# Altium PCB EMGfrontend.PcbDoc
Units mil, origin at the board's own origin, x right, y up, seen from the top; angles counter-clockwise.
Board outline 2050 x 1530 mil, 2 copper layers (Top Layer, Bottom Layer); 29 components, 22 nets, 82 pads, 20 vias.
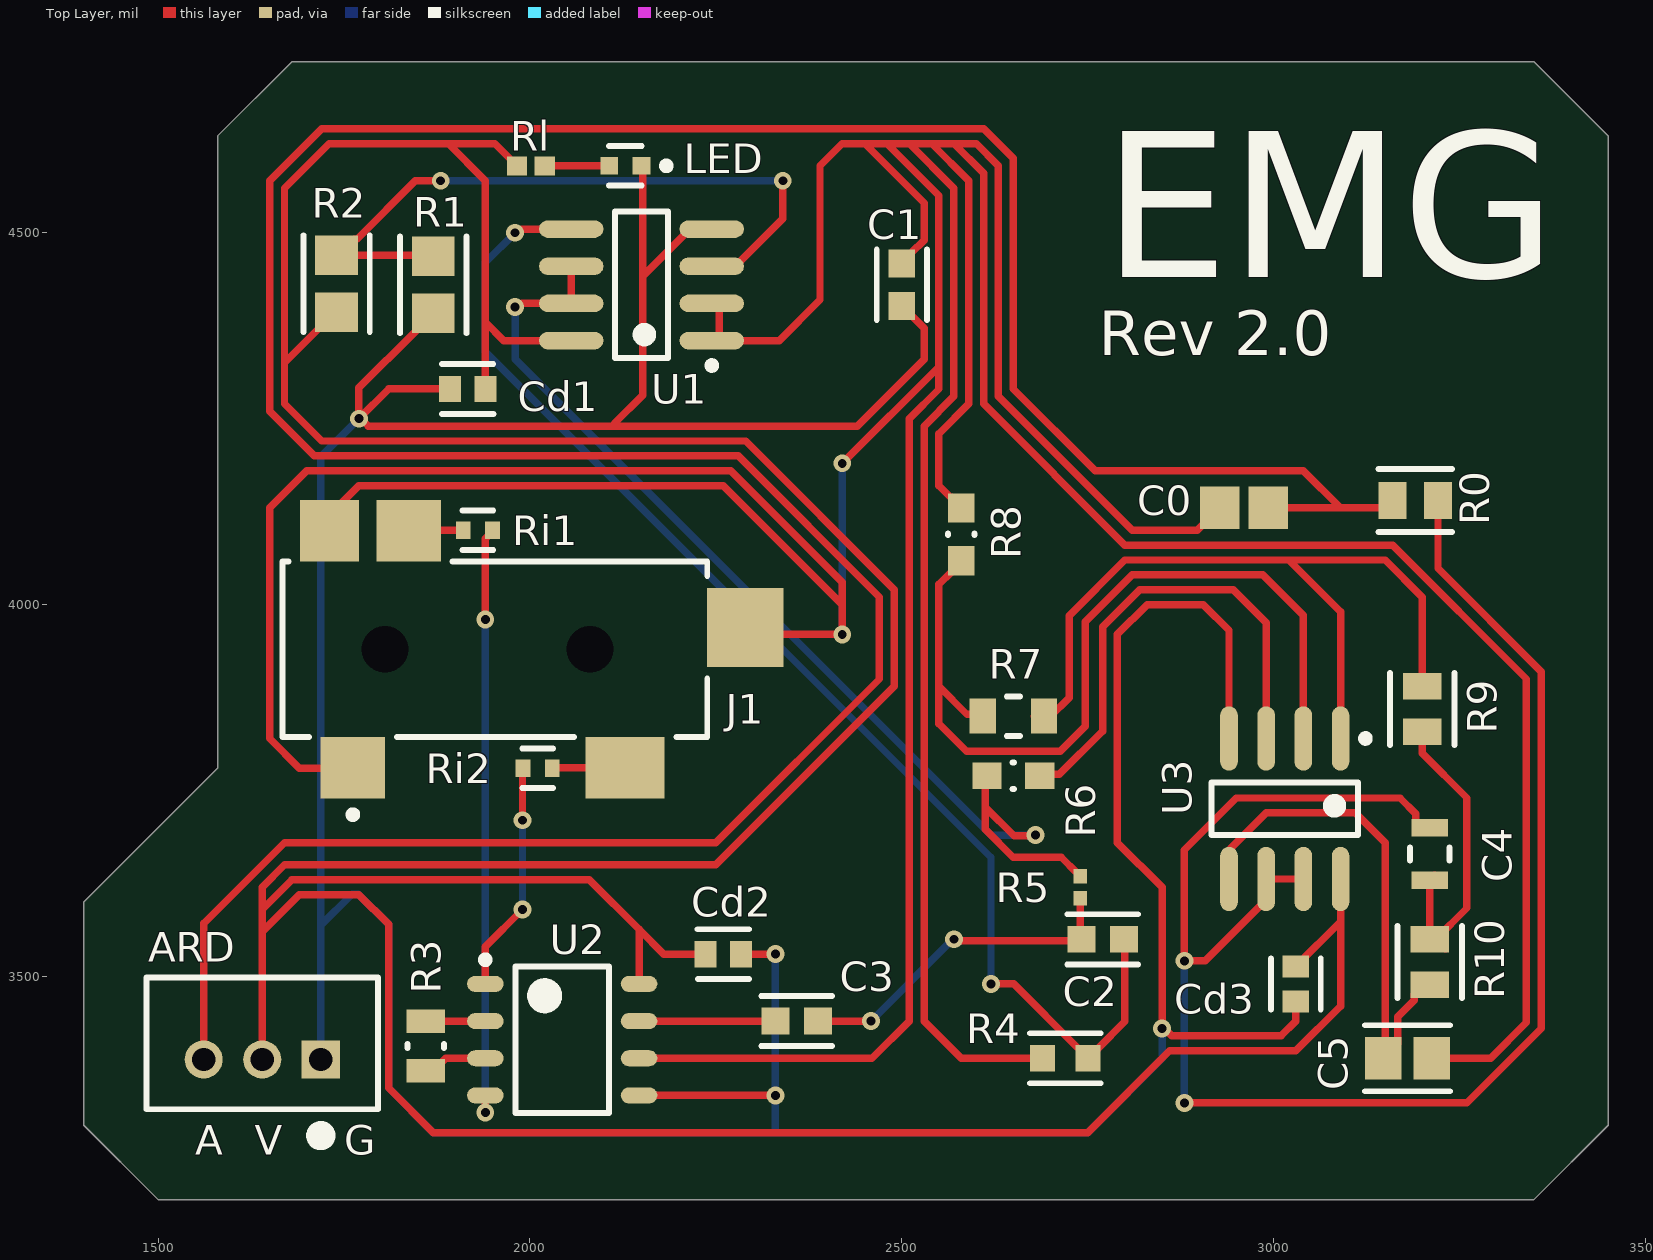
[diagram p0: Top Layer view]
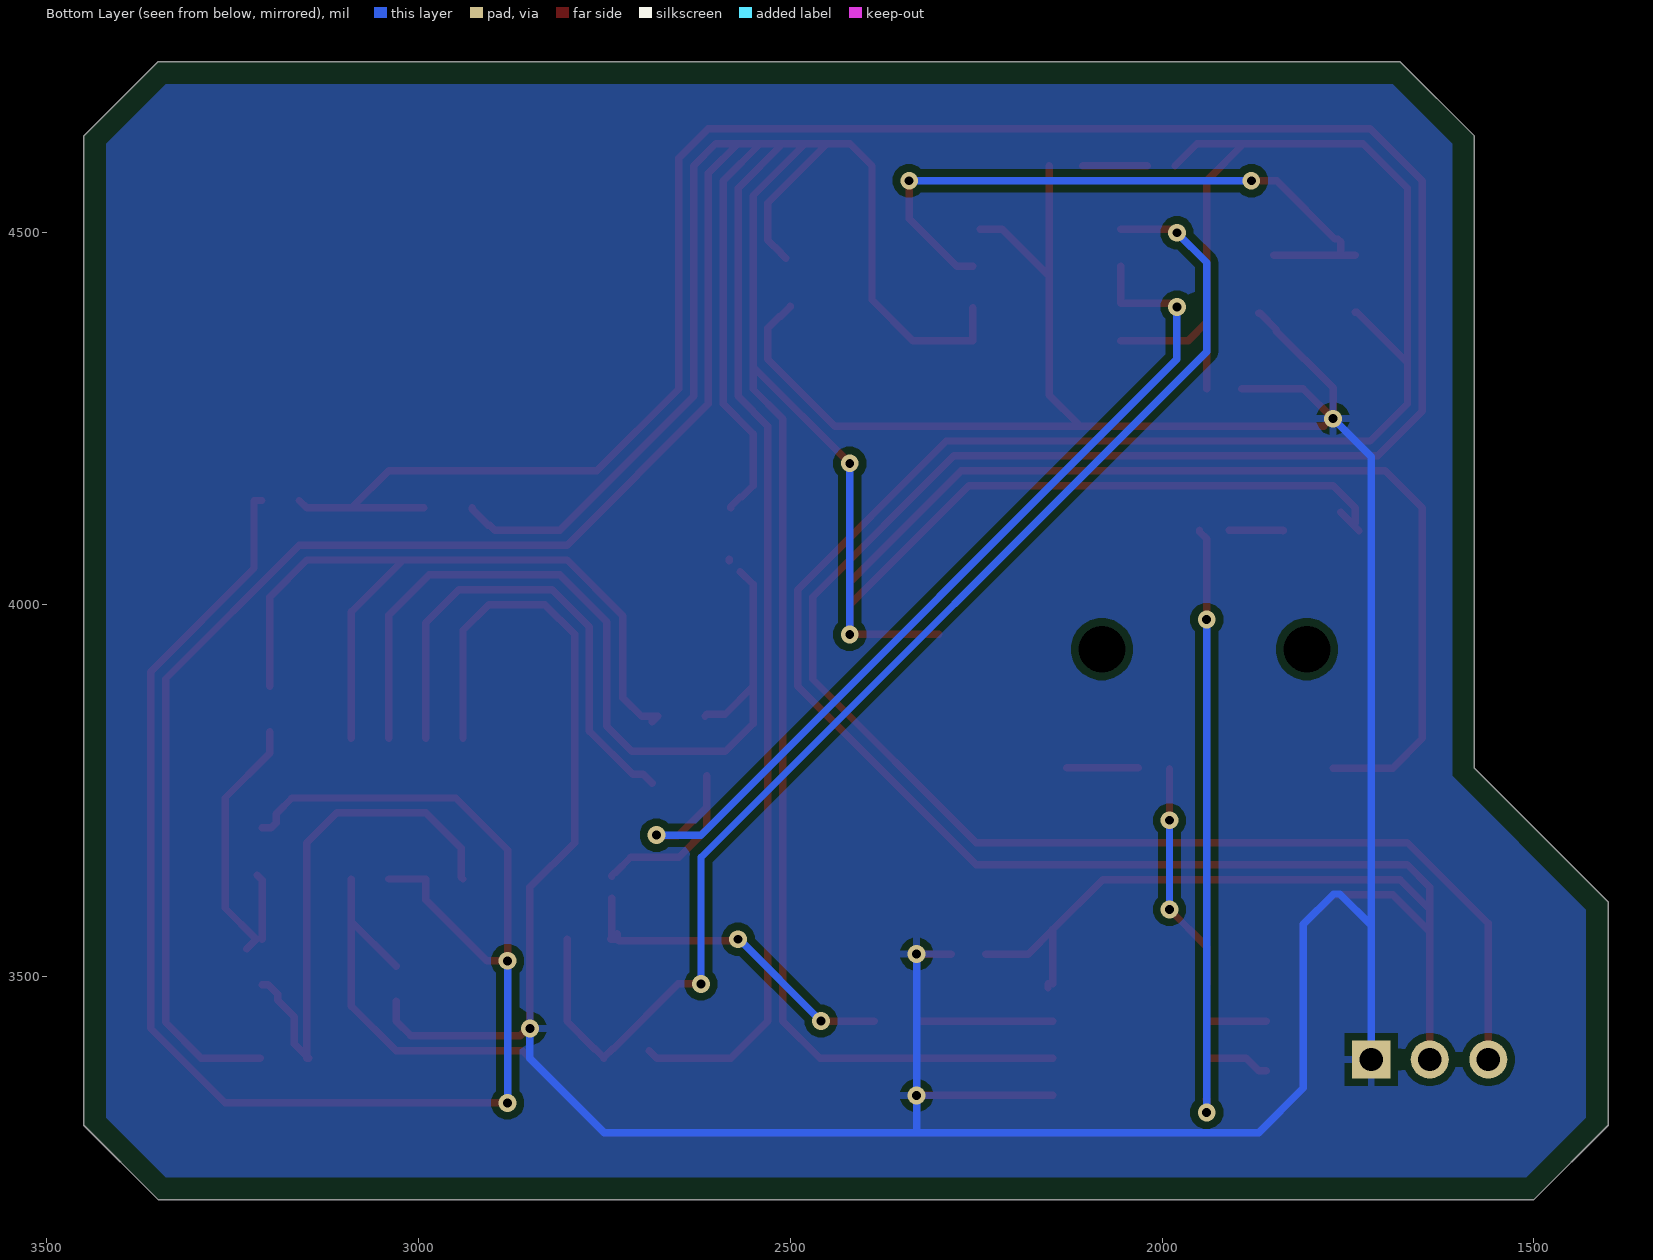
[diagram p1: Bottom Layer view, seen from below]
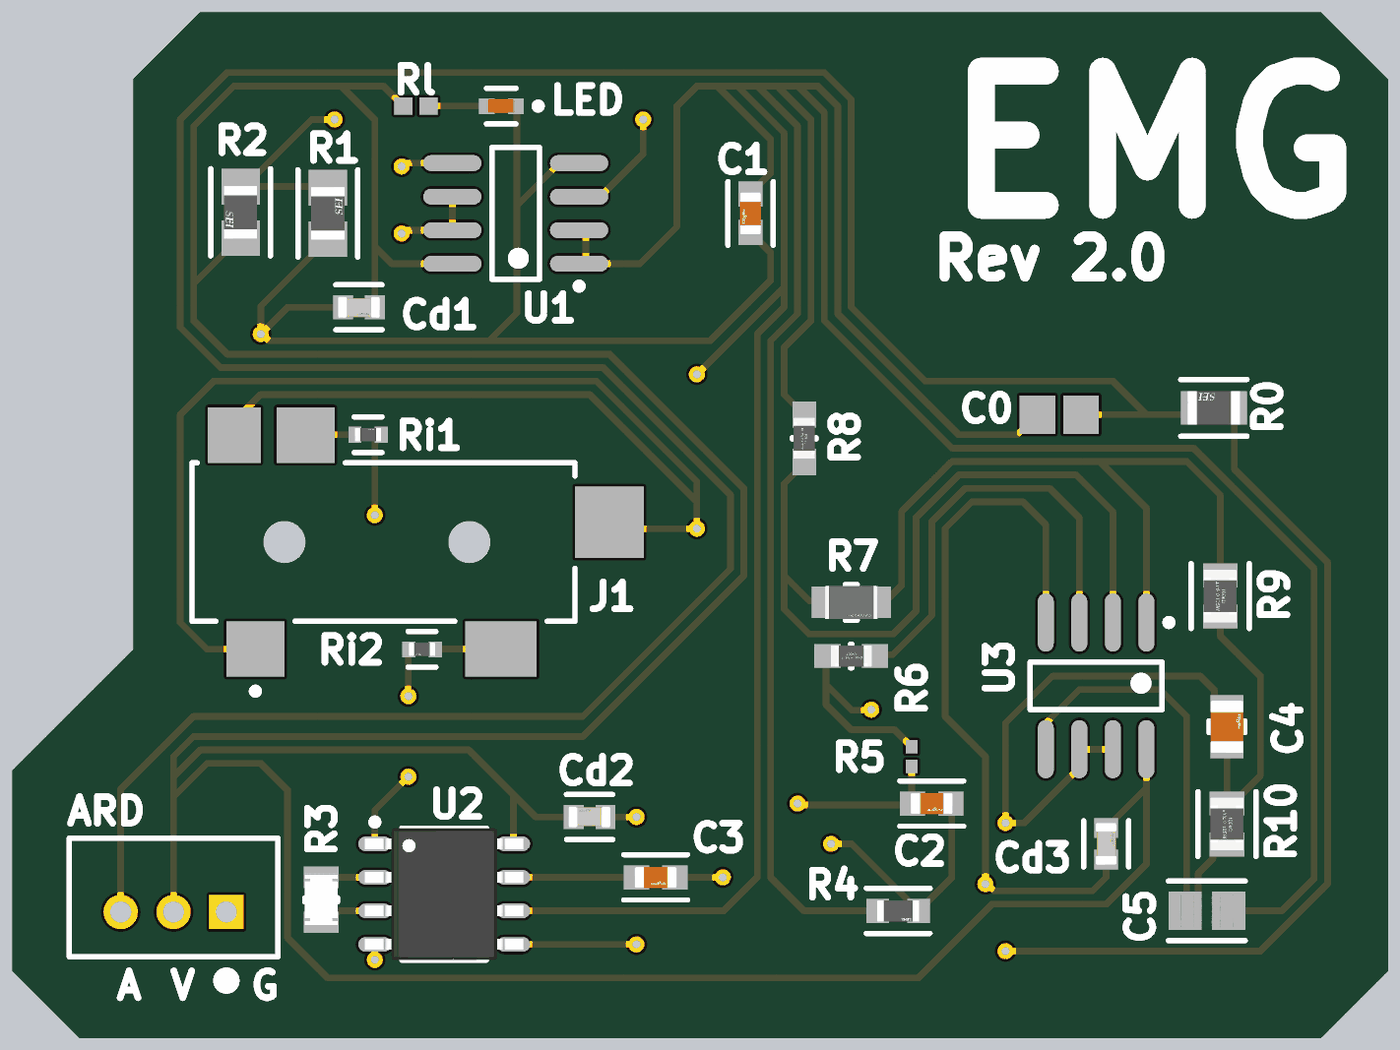
[diagram p2: 3D render of the assembled board from above, using the file's embedded part models]

## Layer stack, top to bottom
Top Solder: solder mask 0.4, Solder Resist, Dk 3.5
Top Layer: signal copper 1.4
Dielectric 1: dielectric 12.6, FR-4, Dk 4.8
Bottom Layer: signal copper 1.4
Bottom Solder: solder mask 0.4, Solder Resist, Dk 3.5

## Board outline
1500,3200 1400,3300 1400,3600 1580,3780 1580,4630 1680,4730 3350,4730 3450,4630 3450,3300 3350,3200

## Design rules (kind name [scope] priority, off if disabled: settings)
Clearance [All] p1: gap=10 ignorepadtopadclearanceinfootprint=FALSE
PolygonConnect [All] p1: connectstyle=Relief reliefconductorwidth=10 reliefentries=4 polygonreliefangle="90 Angle" airgapwidth=10
RoutingVias [All] p1: holewidth=12 width=24 viastyle="Through Hole" minholewidth=12 minwidth=24 maxholewidth=28 maxwidth=50
SolderMaskExpansion [All] p1: expansion=4 istentingtop=FALSE
Width [All] p1: maxlimit=10 minlimit=10 preferedwidth=10
30 further rules are at their usual default settings.

## Classes and differential pairs
component class VREF: C1 Cd1 R1 R2 U1
component class LPF(500Hz): C4 C5 Cd3 R9 R10
component class HPF(20Hz): C2 C3 R4 R5
component class EMGfrontend: ARD C0 J1 LED R0 Ri1 Ri2 Rl
component class AMP2: R6 R7 R8 U3
component class AMP1: Cd2 R3 U2

## Components (designator, comment, footprint, x,y, rotation, side; value= is the part's Value field where it differs from the comment)
ARD "PH2.0" JST-B3B-PH-K-S-3_V 1640,3410 r180 top
C0 "08055A102FAT2A" CAPC2013X94X50NL20T25 2960,4130 r180 top
C1 "GRT188R61H105KE13D" FP-GRT188-0_1-e0_2_0_5-IPC_B 2500,4430 r270 top
C2 "GRT188R61H105KE13D" FP-GRT188-0_1-e0_2_0_5-IPC_B 2770,3550 r0 top
C3 "GRT188R61H105KE13D" FP-GRT188-0_1-e0_2_0_5-IPC_B 2358.61,3440 r0 top
C4 "GRM2165C1H223JA01D" FP-GRM216-0_1-0_05-MFG 3210,3664.57 r90 top
C5 "CL21C103JBFNNNG" FP-CL21-IPC_B 3180,3390 r0 top
Cd1 "C0603C104J5RACTU" FP-C0603C-CF-MFG 1916.38,4290 r180 top value="0.10 μF"
Cd2 "C0603C104J5RACTU" FP-C0603C-CF-MFG 2260,3530 r0 top value="0.10 μF"
Cd3 "C0603C104J5RACTU" FP-C0603C-CF-MFG 3030,3490 r270 top value="0.10 μF"
J1 "" SWIT-35RASMT4BHNTRX_V 2010,3940 r0 top
LED "5988A10107F" FP-5988A10107F-MFG 2128.35,4590 r180 top
R0 "RMCF0805FG470R" FP-RMCF0805-IPC_C 3190.54,4140 r180 top
R1 "RMCF0805FG10K0" FP-RMCF0805-IPC_A 1870,4430 r90 top
R2 "RMCF0805FG10K0" FP-RMCF0805-IPC_A 1740,4431.58 r270 top
R3 "CRCW080515K0FKEA" FP-CRCW0805-e3-IPC_C 1860,3406.5 r90 top
R4 "AC0603FR-1311KL" FP-AC0603-IPC_B 2720,3390 r0 top
R5 "RC0402FR-075K6L" RESC1005X40X25LL05T10 2740,3620 r90 top
R6 "RP73PF1J1K0BTDF" FP-RP73P-1J-MFG 2650,3770 r0 top value=1KΩ
R7 "AC0805FR-0751KL" FP-AC0805-MFG 2650,3850 r0 top value=51KΩ
R8 "RP73PF1J1K0BTDF" FP-RP73P-1J-MFG 2580,4094.57 r270 top value=1KΩ
R9 "CRGCQ0805F22K" FP-CRGCQ0805-IPC_C 3200,3859.45 r270 top value=22KΩ
R10 "CRGCQ0805F22K" FP-CRGCQ0805-IPC_C 3210,3519.45 r270 top value=22KΩ
Ri1 "RC0402FR-075KL" FP-RC0402-MFG 1930,4100 r0 top value=5kΩ
Ri2 "RC0402FR-075KL" FP-RC0402-MFG 2010.32,3780 r180 top value=5kΩ
Rl "RC0402JR-07620RL" RESC1005X40X25ML05T10 2001.3,4590 r180 top
U1 "MCP6002T-E/SN" SOIC-SN8_N 2150,4430 r180 top
U2 "AD8226ARZ" ADI-R-8_L 2043.35,3415 r0 top
U3 "MCP6002T-E/SN" SOIC-SN8_N 3015,3725.51 r270 top

## Footprints (in the part's own frame and the unit in brackets; to place one, negate y for a bottom-side part, rotate by r counter-clockwise, add the part's x,y. Pads: shape width x height; smd on the part's side, far side on the other; paste and mask are expansions set on the pad)
ADI-R-8_L [mm] "SOIC, 8-Leads, Body 5x4mm, Pitch 1.27mm, IPC High Density"
  oval 1.25x0.55 smd: 1(-2.625,1.905) 2(-2.625,0.635) 3(-2.625,-0.635) 4(-2.625,-1.905) 5(2.625,-1.905) 6(2.625,-0.635) 7(2.625,0.635) 8(2.625,1.905)
  silkscreen extent -2.75,-2.5 1.6,2.85, body extent -3,-2.5 3,2.5, height 1.75
CAPC2013X94X50NL20T25 [mm] "Chip Capacitor, 2-Leads, Body 2.01x1.25mm, IPC Medium Density"
  rect 1.35x1.45 smd: 1(-0.825,0) 2(0.825,0)
  body extent -1.1,-0.72 1.11,0.72, height 0.94
FP-5988A10107F-MFG [mm]
  rect 0.6x0.6 smd paste+0 mask+0: 1(-0.55,0) 2(0.55,0)
  silkscreen extent -1.53,-0.67 0.56,0.67, body extent -0.95,-0.42 0.95,0.42, height 0.25
FP-AC0603-IPC_B [mil]
  rect 33.81x35.91 smd paste+0 mask+0: 1(-30.58,0) 2(30.58,0)
  silkscreen extent -47,-34 47,34, body extent -57,-28 57,28, height 10
FP-AC0805-MFG [mm]
  rect 0.9x1.2 smd paste+0 mask+0: 1(-1.05,0) 2(1.05,0)
  silkscreen extent -0.23,-0.67 0.23,0.67, body extent -1.6,-0.77 1.6,0.77, height 0.25
FP-C0603C-CF-MFG [mm]
  rect 0.75x0.9 smd paste+0 mask+0: 1(-0.6,0) 2(0.6,0)
  silkscreen extent -0.87,-0.85 0.88,0.85, body extent -1.2,-0.6 1.2,0.6, height 0.25
FP-CL21-IPC_B [mil]
  rect 49.4x57.33 smd paste+0 mask+0: 1(-32.51,0) 2(32.51,0)
  silkscreen extent -57,-44 57,44, body extent -67,-39 67,39, height 10
FP-CRCW0805-e3-IPC_C [mil]
  rect 31.75x51.5 smd paste+0 mask+0: 1(-33.5,0) 2(33.5,0)
  silkscreen extent -3,-25 3,25, body extent -53,-31 53,31, height 10
FP-CRGCQ0805-IPC_C [mil]
  rect 35.67x51.57 smd paste+0 mask+0: 1(-30.55,0) 2(30.55,0)
  silkscreen extent -48,-43 48,43, body extent -52,-31 52,31, height 10
FP-GRM216-0_1-0_05-MFG [mm]
  rect 0.6x1.25 smd paste+0 mask+0: 1(-0.9,0) 2(0.9,0)
  silkscreen extent -0.23,-0.67 0.23,0.67, body extent -1.3,-0.77 1.3,0.77, height 0.25
FP-GRT188-0_1-e0_2_0_5-IPC_B [mil]
  rect 37.74x35.91 smd paste+0 mask+0: 1(-28.61,0) 2(28.61,0)
  silkscreen extent -47,-34 47,34, body extent -57,-28 57,28, height 10
FP-RC0402-MFG [mm]
  rect 0.5x0.6 smd paste+0 mask+0: 1(-0.5,0) 2(0.5,0)
  silkscreen extent -0.53,-0.67 0.53,0.67, body extent -0.85,-0.4 0.85,0.4, height 0.25
FP-RMCF0805-IPC_A [mil]
  rect 53.33x57.56 smd paste+0 mask+0: 1(-38.42,0) 2(38.42,0)
  silkscreen extent -65,-45 65,45, body extent -85,-48 85,48, height 10
FP-RMCF0805-IPC_C [mil]
  rect 37.58x49.69 smd paste+0 mask+0: 1(-30.54,0) 2(30.54,0)
  silkscreen extent -49,-42 49,42, body extent -53,-31 53,31, height 10
FP-RP73P-1J-MFG [mm]
  rect 1x0.9 smd paste+0 mask+0: 1(-0.9,0) 2(0.9,0)
  silkscreen extent -0.03,-0.45 0.03,0.45, body extent -1.5,-0.55 1.5,0.55, height 0.25
JST-B3B-PH-K-S-3_V [mm] "Connector, 3-Leads, Body 7.9x4.5mm, Pitch 2mm"
  rect 1.3x1.3 hole 0.8: 1(-2,0.55)
  round 1.3 hole 0.8: 2(0,0.55) 3(2,0.55)
  silkscreen extent -3.95,-2.25 3.95,3.4, body extent -3.95,-2.25 3.95,2.25, height 6
RESC1005X40X25LL05T10 [mm] "Chip Resistor, 2-Leads, Body 1.00x0.50mm, IPC High Density"
  rect 0.5x0.45 smd: 1(-0.375,0) 2(0.375,0)
  body extent -0.53,-0.27 0.53,0.28, height 0.4
RESC1005X40X25ML05T10 [mm] "Chip Resistor, 2-Leads, Body 1.00x0.50mm, IPC Low Density"
  rect 0.7x0.65 smd: 1(-0.475,0) 2(0.475,0)
  body extent -0.53,-0.27 0.53,0.28, height 0.4
SOIC-SN8_N [mm] "SOIC, 8-Leads, Body 4.9x3.9mm, Pitch 1.27mm, IPC Medium Density"
  oval 2.2x0.6 smd: 1(-2.4,1.905) 2(-2.4,0.635) 3(-2.4,-0.635) 4(-2.4,-1.905) 5(2.4,-1.905) 6(2.4,-0.635) 7(2.4,0.635) 8(2.4,1.905)
  silkscreen extent -2.53,-2.5 0.9,2.88, body extent -2,-2.5 2,2.5, height 1.75
SWIT-35RASMT4BHNTRX_V [mm] "Jack, 5-Leads, Body 17x6mm"
  rect 2.2x2.1 smd: 1(-6.3,-4.05) 2(-4.4,4.05)
  rect 2.7x2.1 smd: 3(3,-4.05)
  rect 2x2.1 smd: 4(-7.1,4.05)
  rect 2.6x2.7 smd: 5(7.1,0.75)
  rect 0x0 hole 1.6 unplated: MH(-5.2,0) MH(1.8,0)
  silkscreen extent -8.7,-5.77 5.8,3, body extent -11.2,-3 5.8,3, height 5

## Part data
ARD: library part CMP-2000-05164-1, "Male Header, Pitch 2 mm, 1 x 3 Position, Height 6 mm, Tail Length 3.4 mm, -25 to 85 degC, RoHS, Bulk", Manufacturer=JST, Datasheet URL=https://datasheet.ciiva.com/11746/0900766b80826550-11746939.pdf, Datasheet Version=Oct-06, Manufacturer URL=http://www.jst.com/home2.html, No of Positions=3, Pitch=2mm, Style/Orientation=StraightHeader/Plug, Termination=Crimp, Type=ShroudedHeader
C0: library part CMP-2007-04267-1, Manufacturer="AVX Interconnect / Elco", Part Number=08055A102FAT2A
C1 C2 C3: library part CMP-06035-031856-1, "Multi-Layer Ceramic Capacitor 1uF 50V X5R ±10% 0603 Paper T/R", Capacitance=1uF, Case Code (Imperial)=0603, Case Code (Metric)=1608, Dielectric=X5R, Max Operating Temperature=85°C, Min Operating Temperature=-55°C, Ratings=AEC-Q200, Tolerance=10%, Voltage Rating=50V, Case/Package=0603, Length=0.063inch, Mount="Surface Mount", Packaging="Tape and Reel", Thickness=0.035inch, Voltage Rating (DC)=50V, Width=0.031inch
C4: library part CMP-06035-050815-1, "22000pF"
C5: library part CMP-13271-003702-1, "10nF", Case Code (Imperial)=0805, Case Code (Metric)=2012, Dielectric=C0G, Max Operating Temperature=125°C, Min Operating Temperature=-55°C, Package Quantity=3000, Temperature Coefficient=300ppm/°C, Tolerance=5%, Voltage=50V, Capacitance=10nF, Case/Package=0805, Depth=1.25mm, Height=1.25mm, Length=2mm, Mount="Surface Mount", Packaging="Tape and Reel", Radiation Hardening=No, Thickness=0.053inch, Voltage Rating=50V, Width=0.049inch
Cd1 Cd2 Cd3: library part CMP-2006-03056-2, "CAP CER 0.1UF 50V 5% X7R 0603", Capacitance="0.10 μF", Manufacturer=KEMET, Package=C0603C-CF, Temperature="-55°C to +125°C", Temperature Characteristic=X7R, Temperature Coefficient=30ppm/°C, Temperature Range High=+125°C, Temperature Range Low=-55°C, Tolerance=0.05, Voltage Rating="50 V", Automotive=Yes, Automotive Grade="Grade 1", Category=Cap, ComponentLink2Description=Datasheet, ComponentLink2URL=https://api.kemet.com/component-edge/download/datasheet/C0603C100J5GACAUTO.pdf, Device Class L1="Passive Components", Device Class L2=Capacitors, Device Class L3="Ceramic Capacitors", Digikey Description="CAP CER 0.1UF 50V 5% X7R 0603", Height=0.87mm, Lead Free=Yes, Manufacturer Part Number=C0603C104J5RACTU, Material=Ceramic, Mouser Description="Multilayer Ceramic Capacitors MLCC - SMD/SMT 50volts 0.1uF X7R 5%", Octopart=https://octopart.com/c0603c104j5ractu-kemet-10440638, RoHS=TRUE
J1: library part CMP-1772-00001-1, "Female 3.5 mm Phone Jack, 5 Position, Height 5 mm, RoHS, Tape and Reel", Current Rating="50 mA", Package Quantity=3000, Voltage Rating (DC)="12 V", ComponentLink1Description="Manufacturer URL", ComponentLink1URL=http://www.switchcraft.com/, ComponentLink2Description=Datasheet, ComponentLink2URL=http://www.switchcraft.com/Drawings/35rasmt4bhntrx_cd.pdf, Contact Material=Silver, Contact Plating=Silver, DatasheetVersion="Rev. C, 07/2014", Mount="Through Hole", PackageDescription="Female 3.5 mm Phone Jack, 5 Position, Height 5 mm", PackageReference=35RASMT4BHNTRX, Packaging="Tape and Reel", RoHSCompliant=true
LED: library part CMP-00106-100993512-1, "5988A10107F LED Uni-Color Red 2-Pin Chip 0402(1006Metric) T/R", Case/Package=0402, Color=Red, Forward Current=5mA, Forward Voltage=1.6V, Max Operating Temperature=85°C, Min Operating Temperature=-40°C, Power Dissipation=46mW, Reverse Voltage=5V, Height=533.4µm, Luminous Intensity=65mcd, NexarPartId=100993512, RoHS=Compliant, Schedule B="8541402000, 8541402000", Viewing Angle=140°, Wavelength=635nm
R0: library part CMP-26527-003746-1, "470Ω ±1% 0.125W 0805 Thick Film Chip Resistor AEC-Q200 compliant", Case/Package=0805, Max Operating Temperature=155°C, Max Power Dissipation=125mW, Min Operating Temperature=-55°C, Resistance=470R, Resistor Type="Thick Film", Temperature Coefficient=100ppm/°C, Tolerance=1%, Contact Plating=Tin, Features="Automotive AEC-Q200", Mount="Surface Mount", Number of Terminations=2, Packaging="Tape and Reel", Radiation Hardening=No, RoHS Compliant=Yes, Series=RMCF
R1 R2: library part CMP-26527-002739-1, "10kΩ ±1% 0.125W 0805 Thick Film Chip Resistor AEC-Q200 compliant", Case Code (Imperial)=0805, Case Code (Metric)=2012, Max Operating Temperature=155°C, Max Power Dissipation=125mW, Min Operating Temperature=-55°C, Resistance=10kR, Resistor Type="Thick Film", Temperature Coefficient=100ppm/°C, Tolerance=1%, Case/Package=0805, Construction=Rectangular, Contact Plating=Tin, Depth=1.25mm, Features="Automotive AEC-Q200", Height=0.026inch, Length=0.079inch, Military Standard=Not, Mount="Surface Mount", Number of Terminations=2, Packaging="Tape and Reel", Radiation Hardening=No, RoHS Compliant=Yes, Series=RMCF, Width=0.049inch
R3: library part CMP-2001-04967-2, "RES Thick Film, 15kΩ, 1%, 0.125W, 100ppm/°C, 0805", Case Code (Imperial)=0805, Case Code (Metric)=2012, Max Operating Temperature=155°C, Max Power Dissipation=125mW, Min Operating Temperature=-55°C, Package Quantity=10, Resistance=15kR, Temperature Coefficient=100ppm/°C, Tolerance=1%, Voltage Rating=150V, Case/Package=0805, Composition="Thick Film", Contact Plating=Tin, Depth=1.25mm, Features="Automotive AEC-Q200", Height=0.45mm, Lead Free="Lead Free", Length=2mm, Military Standard=Not, Mount="Surface Mount", Number of Terminations=2, Packaging="Tape and Reel", Power Rating=125mW, Radiation Hardening=No, Termination=SMD/SMT, Voltage Rating (DC)=150V, Weight=0.000194oz, Width=0.049inch
R4: library part CMP-03412-047641-1, "RES 11KΩ 1.00% 0.1W 0603", RoHS Compliant=Yes
R5: library part CMP-2002-07756-1, Manufacturer="Yageo / Phycomp", Part Number=RC0402FR-075K6L
R6 R8: library part CMP-03211-004517-1, "RES SMD 1K OHM 0.1% 1/6W 0603", Manufacturer="TE Connectivity", Package=RP73P-1J, Power Rating=0.166W, Resistance=1KΩ, Temperature="-55°C to +155°C", Temperature Coefficient=25ppm/°C, Temperature Range High=+155°C, Temperature Range Low=-55°C, Tolerance=0.001, Voltage Rating=100V, Automotive=No, Category=Res, ComponentLink2Description=Datasheet, ComponentLink2URL=https://www.te.com/commerce/DocumentDelivery/DDEController?Action=srchrtrv&DocNm=1773272&DocType=DS&DocLang=English, Composition="Thin Film", Device Class L1="Passive Components", Device Class L2=Resistors, Device Class L3="Chip SMD Resistors", Digikey Description="RES SMD 1K OHM 0.1% 1/6W 0603", Height=0.55mm, Ipc Land Pattern Name=RESC15580X45, Lead Free=Yes, Manufacturer Part Number=RP73PF1J1K0BTDF, Octopart=https://octopart.com/rp73pf1j1k0btdf-te+connectivity-45465729, RoHS=TRUE, Series=RP73P
R7: library part CMP-03412-037324-1, "RES SMD 51K OHM 1% 1/8W 0805", Manufacturer=Yageo, Package=AC0805, Power Rating=1/8W, Resistance=51KΩ, Temperature="-55°C to +155°C", Temperature Range High=+155°C, Temperature Range Low=-55°C, Tolerance=0.01, Voltage Rating=150V, Automotive=Yes, Automotive Grade="Grade 0", Category=Res, ComponentLink2Description=Datasheet, ComponentLink2URL=http://www.yageo.com/documents/recent/PYu-AC_51_RoHS_L_6.pdf, Composition="Thick Film", Device Class L1="Passive Components", Device Class L2=Resistors, Device Class L3="Chip SMD Resistors", Digikey Description="RES SMD 51K OHM 1% 1/8W 0805", Footprint Url=http://www.yageo.com/exep/pages/download/literatures/PYu-R_Mount_10.pdf, Height=0.6mm, Ipc Land Pattern Name=RESC200125X50, Lead Free=Yes, Manufacturer Part Number=AC0805FR-0751KL, Mouser Description="Thick Film Resistors - SMD 1/8W 51K ohm 1%", Octopart=https://octopart.com/ac0805fr-0751kl-yageo-24874955, RoHS=TRUE, Series=AC
R9 R10: library part CMP-03211-003824-1, "CRGCQ0805 22KΩ 0.125W ±100ppm/°C 1% 150V", Ambient Temperature Range High=+70°C, Manufacturer="TE Connectivity", Package=CRGCQ0805, Power Rating=0.125W, Resistance=22KΩ, Temperature="-55°C to +155°C", Temperature Coefficient=±100ppm/°C, Temperature Range High=+155°C, Temperature Range Low=-55°C, Tolerance=0.01, Voltage Rating=150V, Automotive=Yes, Automotive Grade="Grade 985", Category=Res, ComponentLink2Description=Datasheet, ComponentLink2URL=https://www.te.com/commerce/DocumentDelivery/DDEController?Action=showdoc&DocId=Data+Sheet%7F1773204-3%7F1%7Fpdf%7FEnglish%7FENG_DS_1773204-3_1.pdf%7F4-2176341-994, Composition="Thick Film", Device Class L1="Passive Components", Device Class L2=Resistors, Device Class L3="Chip SMD Resistors", Height=0.65mm, Ipc Land Pattern Name=RESC200125X55, Lead Free=Yes, Manufacturer Part Number=CRGCQ0805F22K, Octopart=https://octopart.com/crgcq0805f22k-te+connectivity-91018161, RoHS=TRUE, Series=CRGCQ
Ri1 Ri2: library part CMP-03412-013078-1, "RES SMD 5K OHM 1% 1/16W 0402", Manufacturer=Yageo, Package=RC0402, Power Rating=0.0625W, Resistance=5kΩ, Temperature="-55°C to +155°C", Temperature Coefficient=100ppm/°C, Temperature Range High=+155°C, Temperature Range Low=-55°C, Tolerance=1%, Voltage Rating=50V, Automotive=No, Category=Res, ComponentLink2Description=Datasheet, ComponentLink2URL=http://www.yageo.com/documents/recent/PYu-RC_Group_51_RoHS_L_10.pdf, Composition="Thick Film", Device Class L1="Passive Components", Device Class L2=Resistors, Device Class L3="Chip SMD Resistors", Digikey Description="RES SMD 5K OHM 1% 1/16W 0402", Footprint Url=https://pccomponents.com/datasheets/YAGEO-20RESISTORS.PDF, Height=0.4mm, Ipc Land Pattern Name=RESC10050X35, Lead Free=Yes, Manufacturer Part Number=RC0402FR-075KL, Octopart=https://octopart.com/rc0402fr-075kl-yageo-25450038, RoHS=TRUE, Series=RC_L
Rl: library part CMP-2002-07079-1, Manufacturer="Yageo / Phycomp", Part Number=RC0402JR-07620RL
U1 U3: library part CMP-0187-00363-3, "None", Case/Package=SOIC, Input Bias Current=1pA, Input Offset Voltage (Vos)=4.5mV, Max Operating Temperature=125°C, Max Supply Voltage=6V, Min Operating Temperature=-40°C, Min Supply Voltage=1.8V, Nominal Supply Current=100uA, Operating Supply Voltage=5.5V, Output Current=23mA, Package Quantity=3300, Power Supply Rejection Ratio (PSRR)=86dB, Voltage Gain=112dB, Amplifier Type="GENERAL PURPOSE", Common Mode Rejection Ratio=60dB, Gain Bandwidth Product=1MHz, Lead Free="Lead Free", Mount="Surface Mount", Number of Channels=2, Number of Circuits=2, Number of Elements=2, Number of Pins=8, Operating Supply Current=100uA, Output Current per Channel=23mA, Packaging="Tape and Reel", Radiation Hardening=No, RoHS Compliant=Yes, Series=-, Slew Rate=0.6V/µs, Supply Current=100uA, Technology=CMOS, Unity Gain Bandwidth Product=1MHz
U2: library part CMP-2000-05749-1, "Wide Supply Range, Rail-to-Rail Output Instrumentation Amplifier, 2.2 to 36 V, -40 to 125 degC, 8-Pin SOIC (R-8), RoHS, Tube", Current - Input Bias=20nA, Current - Output / Channel=13mA, Current - Supply=350µA, Manufacturer="Analog Devices", Operating Temperature=-40°C~125°C, Package / Case="8-SOIC(0.154\",3.90mmWidth)", Package Description="8-Pin Small Outline Package, Body 4.9 x 3.9 mm, Pitch 1.27 mm", Package Reference=R-8, Standard Package=98, Supplier Device Package=8-SOIC, Voltage - Input Offset=100µV, Voltage - Supply, Single/Dual (±)=2.2V~36V,±1.35V~18V, -3db Bandwidth=1.5MHz, Amplifier Type=Instrumentation, Category=IntegratedCircuits(ICs), Datasheet URL=http://www.analog.com/media/en/technical-documentation/data-sheets/AD8226.pdf, Datasheet Version="Rev. C, 09/2012", Design Resources=PLCandDCSUniversalAnalogInputUsingEither4or6-PinTerminalBlock, EDA / CAD Models=DownloadfromAcceleratedDesigns, Family=Linear-Amplifiers-Instrumentation,OPAmps,BufferAmps, Gain Bandwidth Product=-, Manufacturer URL=http://www.analog.com/, Mfg Application Notes=AutomaticExternalDefibrillator(AED)SolutionsElectromagneticFlowMeterSolutionsMotorControlSolution—ServoControlProgrammableLogicControllers(PLCs)SolutionsElectrocardiogram(ECG)Solutions, Mounting Technology=SurfaceMount, Mounting Type=SurfaceMount, Number of Circuits=1, Online Catalog=Instrumentation, Output Type=Rail-to-Rail, Packaging=Tube, PCN Design/Specification=PolyimideAlignmentTarget11/Aug/2015, Product Training Modules=CommonPhotodiodeOp-AmpCircuitProblemsandSolutionsIndirectCurrentFeedbackInstrumentationAmplifierApplicationsGuide, Series=-, Slew Rate=0.6V/µs

## Via types
v1: diameter 24, hole 12, Top Layer to Bottom Layer, 20 vias

## Nets (pads, with @x,y where several pads share a name; then routed paths per layer and width w, separated by ;. In a path a pad name is that pad's centre, name@x,y a point inside that pad or via, vN(x,y) a via of type N, cw(c..) or ccw(c..) an arc to the next point about the centre after c; other vN are vias at no path point)
NetARD_1: ARD.1 C1.2 Cd1.2 Cd2.2 Cd3.2 LED.1 R1.1 U1.4 U2.5 U3.4 | length 5634.2
  Top Layer w10: R1.1 1867.88,4391.58 1846.22,4369.92 1846.22,4367.8 1770,4291.58 v1(1770,4250) ; Cd1.2 1810,4290 v1(1770,4250) ; 2114.23,4244.23 2151.65,4281.65 2151.65,4441.65 ; U2.5 v1(2330,3340) ; LED.1@2151.65,4590 2151.65,4441.65 ; U1.4 2215,4505 2151.65,4441.65 ; Cd2.2 v1(2330,3530) ; C1.2 2500,4400.47 2512.96,4387.52 2513.87,4387.52 2530,4371.39 2530,4330 2440,4240 2114.23,4240 1782.86,4240 1772.86,4250 v1(1770,4250) ; U3.4 2940,3965.54 2905.54,4000 2830,4000 2790,3960 2790,3680 2850,3620 v1(2850,3430) 2852.86,3430 2862.86,3420 3010,3420 3030,3440 Cd3.2
  Bottom Layer w10: ARD.1 1718.74,3568.74 ; v1(1770,4250) 1718.74,4198.74 1718.74,3568.74 ; v1(2330,3530) v1(2330,3340) 2330,3290 ; v1(2850,3430) 2850,3390 2750,3290 2330,3290 ; 1718.74,3568.74 1760.86,3610.86 1769.14,3610.86 1810,3570 1810,3350 1870,3290 2330,3290
NetARD_2: ARD.2 Cd1.1 Cd2.1 Cd3.1 R2.2 Rl.2 U1.8 U2.8 U3.8 | length 6253.2
  Top Layer w10: ARD.2 1640,3560 ; R2.2 1737.88,4393.17 1670,4325.28 ; Cd1.1 1940,4380 ; Rl.2 1952.6,4620 1890,4620 ; U1.8 1965,4355 1940,4380 ; U2.8 2146.69,3563.31 ; U2.8@2153.35,3485 U2.8@2153.35,3490 ; Cd2.1@2236.9,3530 Cd2.1 2180,3530 2146.69,3563.31 ; Cd3.1 3090,3573.62 ; U3.8 3090,3573.62 ; 1640,3560 1690,3610 1770,3610 1810,3570 1810,3350 1870,3290 2750,3290 2860,3400 3030,3400 3090,3460 3090,3573.62 ; 1640,3560 1640,3590 ; 1640,3590 1640,3620 1670,3650 2250,3650 2490,3890 2490,4020 2290,4220 1720,4220 1670,4270 1670,4325.28 ; 1640,3590 1680,3630 2080,3630 2146.69,3563.31 ; 1670,4325.28 1670,4560 1730,4620 1890,4620 ; 1890,4620 1940,4570 1940,4380
NetARD_3: ARD.3 C0.1 R0.2 | length 4604.9
  Top Layer w10: ARD.3 1561.26,3571.26 1670,3680 2250,3680 2470,3900 2470,4010 2280,4200 1710,4200 1650,4260 1650,4570 1720,4640 2610,4640 2650,4600 2650,4290 2760,4180 3040,4180 3090,4130 ; C0.1 3090,4130 ; R0.2 3150,4130 3090,4130
NetC0_2: C0.2 C1.1 C5.2 J1.1 J1.4 J1.5 R4.1 R8.1 U1.1 U1.2 U2.6 | length 9672.5
  Top Layer w10: J1.4@1735.2,4099.45 J1.4@1759.93,4124.18 ; J1.4@1740,4110 1740,4130 1770,4160 2260,4160 2420,4000 ; J1.1@1770,3780 1690,3780 1650,3820 1650,4130 1700,4180 2270,4180 2420,4030 2420,4000 ; U2.6 2460,3390 2510,3440 2510,4250 2550,4290 2550,4320 ; U1.2@2254.49,4399.32 2254.49,4355 2335,4355 2390,4410 2390,4590 2420,4620 2450,4620 ; J1.5@2300.47,3960 v1(2420,3960) 2420,4000 ; v1(2420,4190) 2550,4320 ; C1.1@2505.69,4465.69 2506.16,4465.69 2512.96,4472.48 2512.96,4472.96 2530,4490 2530,4540 2450,4620 ; R8.1 2580,4131.97 2567.28,4144.69 2565.31,4144.69 2550,4160 2550,4230 2590,4270 2590,4570 2540,4620 ; R4.1@2689.42,3400 2679.42,3390 2580,3390 2530,3440 2530,4240 2570,4280 2570,4560 2510,4620 ; C0.2 2927.52,4128.03 2905.94,4106.46 2903.98,4106.46 2897.52,4100 2810,4100 2630,4280 2630,4590 2600,4620 2570,4620 ; C5.2 3291.72,3390 3340,3438.28 3340,3900 3160,4080 2800,4080 2610,4270 2610,4580 2570,4620 ; 2450,4620 2480,4620 ; 2480,4620 2510,4620 ; 2480,4620 2550,4550 2550,4320 ; 2510,4620 2540,4620 ; 2540,4620 2570,4620
  Bottom Layer w10: v1(2420,3960) v1(2420,4190)
NetC2_1: C2.1 C3.2 R5.1 | length 464.9
  Top Layer w10: C3.2 v1(2458.61,3440) ; v1(2570,3550) 2572.01,3547.99 2730.8,3547.99 C2.1@2732.81,3550 ; C2.1@2732.81,3557.66 C2.1@2732.81,3550 ; R5.1 2740,3551.39 C2.1 C2.1@2732.81,3550
  Bottom Layer w10: v1(2458.61,3440) 2568.61,3550 v1(2570,3550)
NetC2_2: C2.2 R4.2 U1.5 | length 1728.5
  Top Layer w10: v1(1980,4500) 1983.79,4500 1988.79,4505 U1.5 ; v1(2620,3490) 2650.58,3490 2737.62,3402.96 2738.68,3402.96 R4.2@2750.58,3391.05 ; R4.2 R4.2@2750.58,3391.05 ; C2.2@2800,3550 2800,3439.42 2763.53,3402.96 2762.48,3402.96 R4.2@2750.58,3391.05
  Bottom Layer w10: v1(1980,4500) 1940,4460 1940,4340 2620,3660 v1@2620,3500
NetC3_1: C3.1 U2.7 | length 183.3
  Top Layer w10: U2.7 C3.1
NetC4_1: C4.1 R9.2 R10.1 | length 428.1
  Top Layer w10: R9.2 3200,3800 3260,3740 3260,3592.05 3217.95,3550 R10.1@3230.78,3537.16 ; R10.1 C4.1 C4.1@3216.81,3635.94
NetC4_2: C4.2 R0.1 U3.6 U3.7 | length 2244
  Top Layer w10: v1(2880,3330) 3260,3330 3360,3430 3360,3910 3221.09,4048.91 R0.1 R0.1@3210.54,4140 ; U3.7 U3.6 2990,3603.21 2907.81,3521.02 v1(2880,3521.02) 2880,3670 2950,3740 3170,3740 3191.18,3718.82 3191.18,3706.81 3198,3700 C4.2
  Bottom Layer w10: v1(2880,3330) v1(2880,3521.02)
NetC5_1: C5.1 R10.2 U3.5 | length 705.7
  Top Layer w10: U3.5 2942.61,3633.63 2942.61,3672.61 2990,3720 3110,3720 3150,3680 C5.1@3150,3390 ; C5.1 3167.19,3409.7 3167.19,3446.08 3189.22,3468.11 3189.22,3476.06 3202.05,3488.89 R10.2
NetJ1_2: J1.2 Ri1.1 | length 73.5
  Top Layer w10: J1.2 1837.32,4100 Ri1.1@1910,4100
NetJ1_3: J1.3 Ri2.1 | length 96.4
  Top Layer w10: Ri2.1@2031.68,3780.55 J1.3
NetLED_2: LED.2 Rl.1 | length 86.7
  Top Layer w10: Rl.1 LED.2
NetR1_2: R1.2 R2.1 U1.3 | length 904.9
  Top Layer w10: R2.1 R2.1@1760,4470 ; R1.2@1850,4470 R2.1@1760,4470 ; v1(1880,4570) 1845.86,4570 1767.52,4491.67 1763.78,4491.67 1760,4487.88 R2.1@1760,4470 ; U1.3@2254.49,4455 2275.98,4455 2340,4519.02 v1(2340,4570)
  Bottom Layer w10: v1(1880,4570) v1(2340,4570)
NetR3_1: R3.1 U2.3 | length 87
  Top Layer w10: R3.1 1869.88,3373 1886.87,3390 U2.3
NetR3_2: R3.2 U2.2 | length 80
  Top Layer w10: R3.2 U2.2
NetR5_2: R5.2 R6.1 U1.6 U1.7 | length 1473.4
  Top Layer w10: v1(1980,4400) 1983.79,4400 1988.79,4405 U1.7 U1.6 ; R6.1@2612.28,3770 2612.28,3727.72 ; v1(2680,3690) 2679.09,3689.09 2650.91,3689.09 2612.28,3727.72 ; R5.2 2740,3635.75 2736.14,3639.61 2735.16,3639.61 2714.76,3660 2650,3660 2612.28,3697.72 2612.28,3727.72
  Bottom Layer w10: v1(1980,4400) 1980,4330 2620,3690 v1(2680,3690)
NetR6_2: R6.2 U3.3 | length 668.2
  Top Layer w10: R6.2@2685.43,3760 2697.46,3772.02 2712.02,3772.02 2770,3830 2770,3970 2820,4020 2945.54,4020 2990,3975.54 U3.3
NetR7_1: R7.1 R8.2 U3.2 | length 1168.3
  Top Layer w10: R8.2@2567.28,4044.45 2550,4027.17 2550,3890 ; R8.2@2582.01,4059.18 R8.2@2582.01,4061.14 ; R7.1@2614.57,3850 2612.28,3852.29 2587.71,3852.29 2550,3890 ; U3.2 3040,3985.54 2985.54,4040 2810,4040 2746.71,3976.71 2746.71,3836.71 2712.99,3802.99 2587.01,3802.99 2550,3840 2550,3890
NetR7_2: R7.2 R9.1 U3.1 | length 1100.3
  Top Layer w10: U3.1 3090,3990.54 3020.54,4060 ; R9.1 3200,4010 3150,4060 3020.54,4060 ; R7.2@2685.43,3850 2678.15,3850 2685.43,3842.72 R7.2@2685.43,3850 ; R7.2@2685.43,3850 R7.2 2700,3850 2725,3875 2725,3985 2800,4060 3020.54,4060
NetRi1_2: Ri1.2 U2.4 | length 805.2
  Top Layer w10: v1(1940,3317) 1940,3334.62 U2.4@1940.38,3335 ; v1(1940,3980) 1940,4088.35 1949.68,4098.03 Ri1.2
  Bottom Layer w10: v1(1940,3317) v1(1940,3980)
NetRi2_2: Ri2.2 U2.1 | length 310.1
  Top Layer w10: U2.1 1940,3540 v1(1990,3590) ; v1(1990,3710) Ri2.2@1990,3779.37
  Bottom Layer w10: v1(1990,3590) v1(1990,3710)
pads on no net: J1.MH

## Polygon pours and split planes (outlines as drawn)
NetARD_1 on Bottom Layer "NETARD_1_L02_P001" (solid, remove dead copper, pour order 1): 1430,3310 1510,3230 3340,3230 3420,3310 3420,4620 3340,4700 1690,4700 1610,4620 1610,3770 1430,3590

## Silkscreen, mask and mechanical layers (free items; w line width, h text height)
Top Overlay:
  text "EMG" at 2770,4440 h200
  text "Rev 2.0" at 2765,4335 h60
  text "A" at 1550,3260 h40
  text "V" at 1630,3260 h40
  text "G" at 1750,3260 h40
Mechanical 1:
  the board outline again, w10
Mechanical 15:
  lines w1: 1400,3120 3450,3120 3450,4730 1400,4730 1400,3120